# Altium PCB KRing_B2.PcbDoc
Units mil, origin at the board's own origin, x right, y up, seen from the top; angles counter-clockwise.
Board outline 1488.19 x 1488.19 mil, 2 copper layers (Top Layer, Bottom Layer), stack 42.17 mil thick; 73 components, 48 nets, 266 pads, 198 vias.
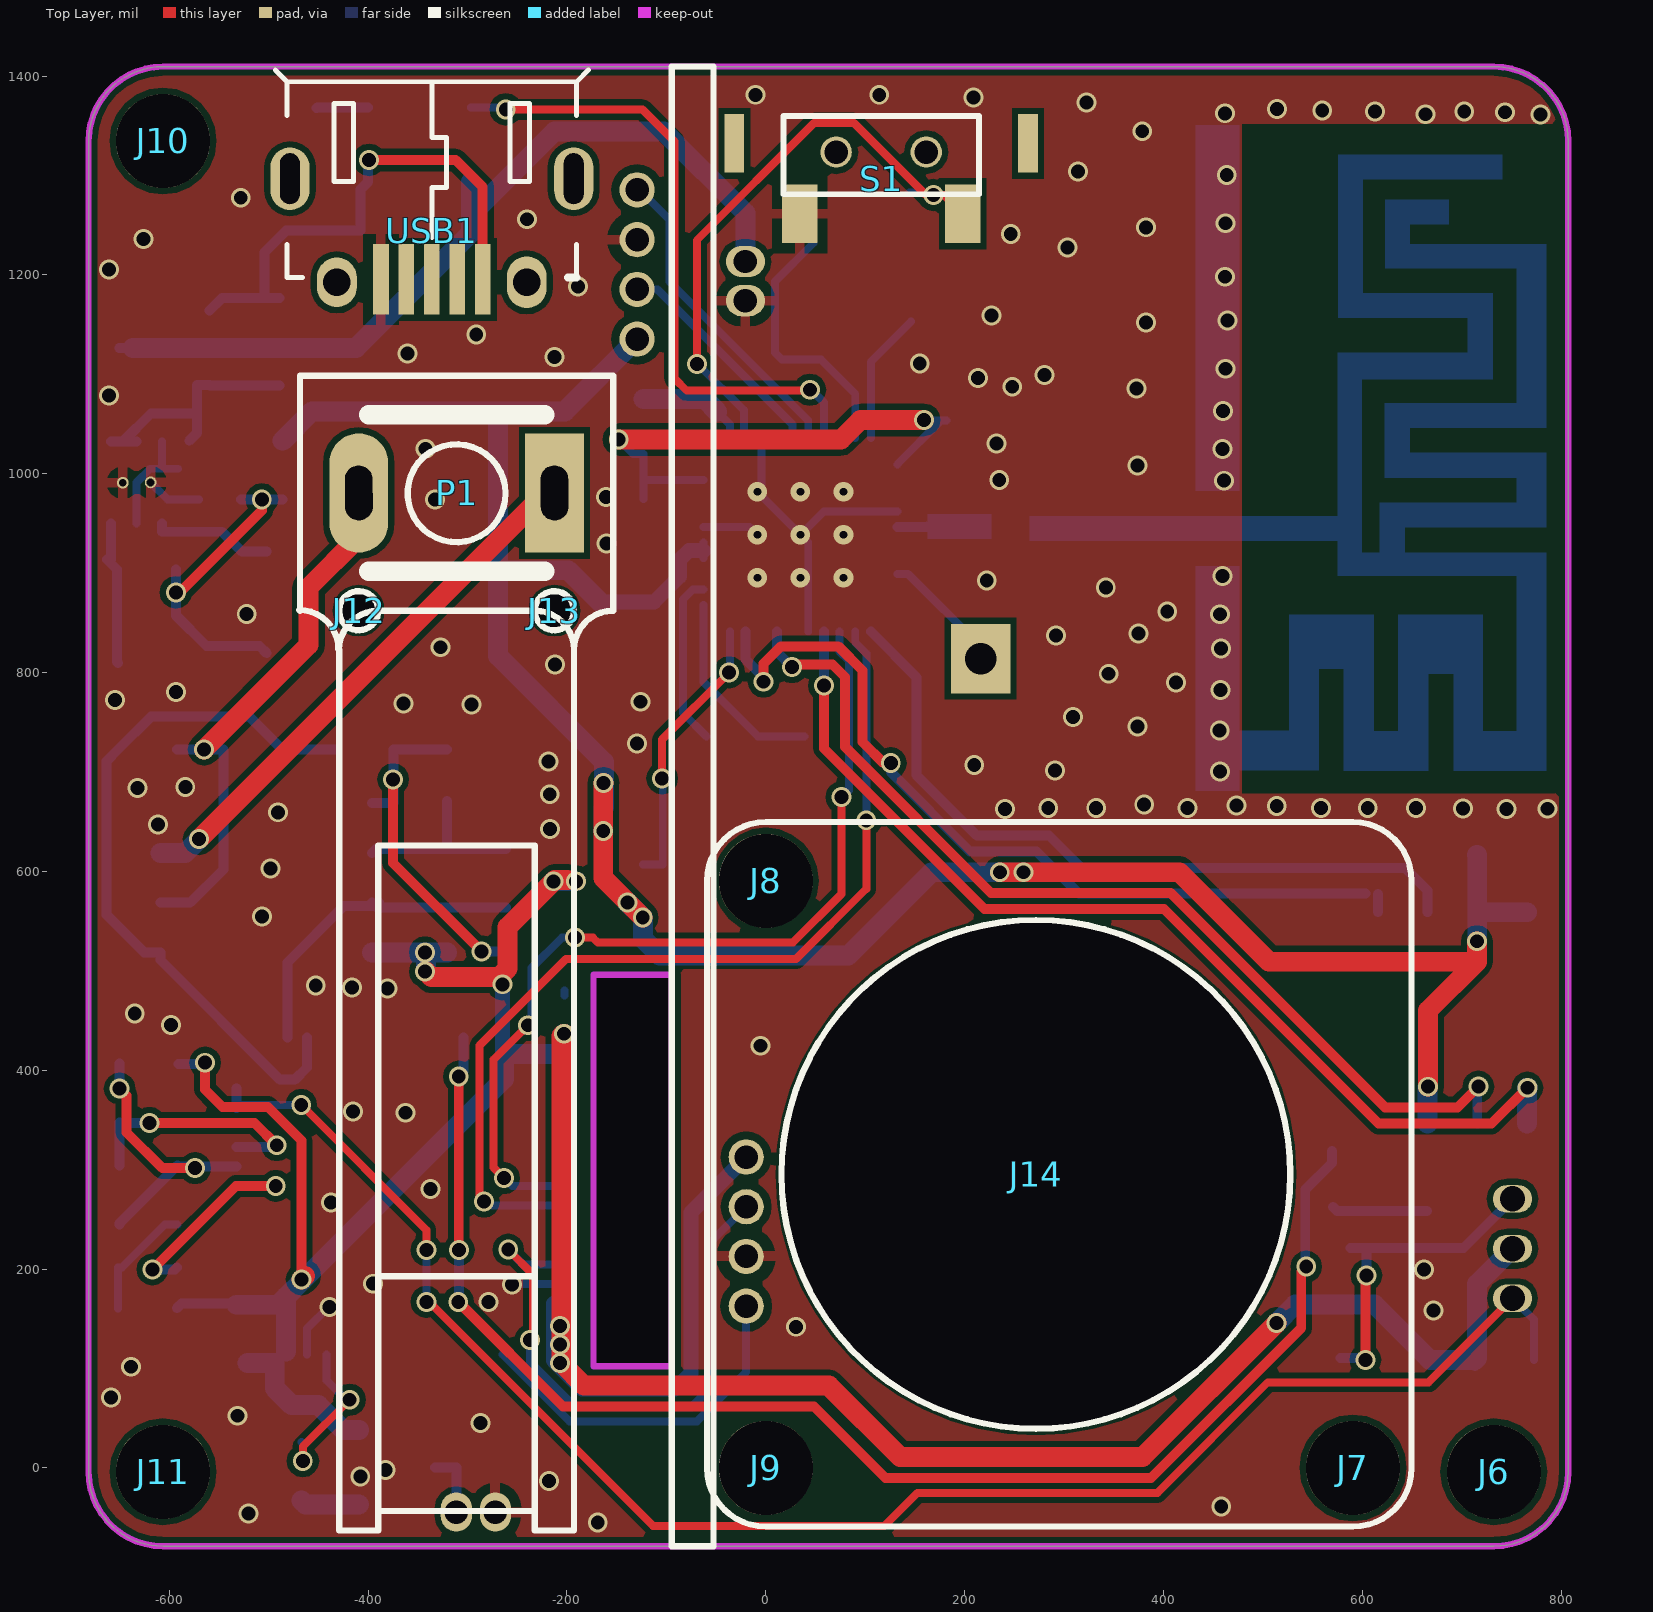
[diagram p0: Top Layer view]
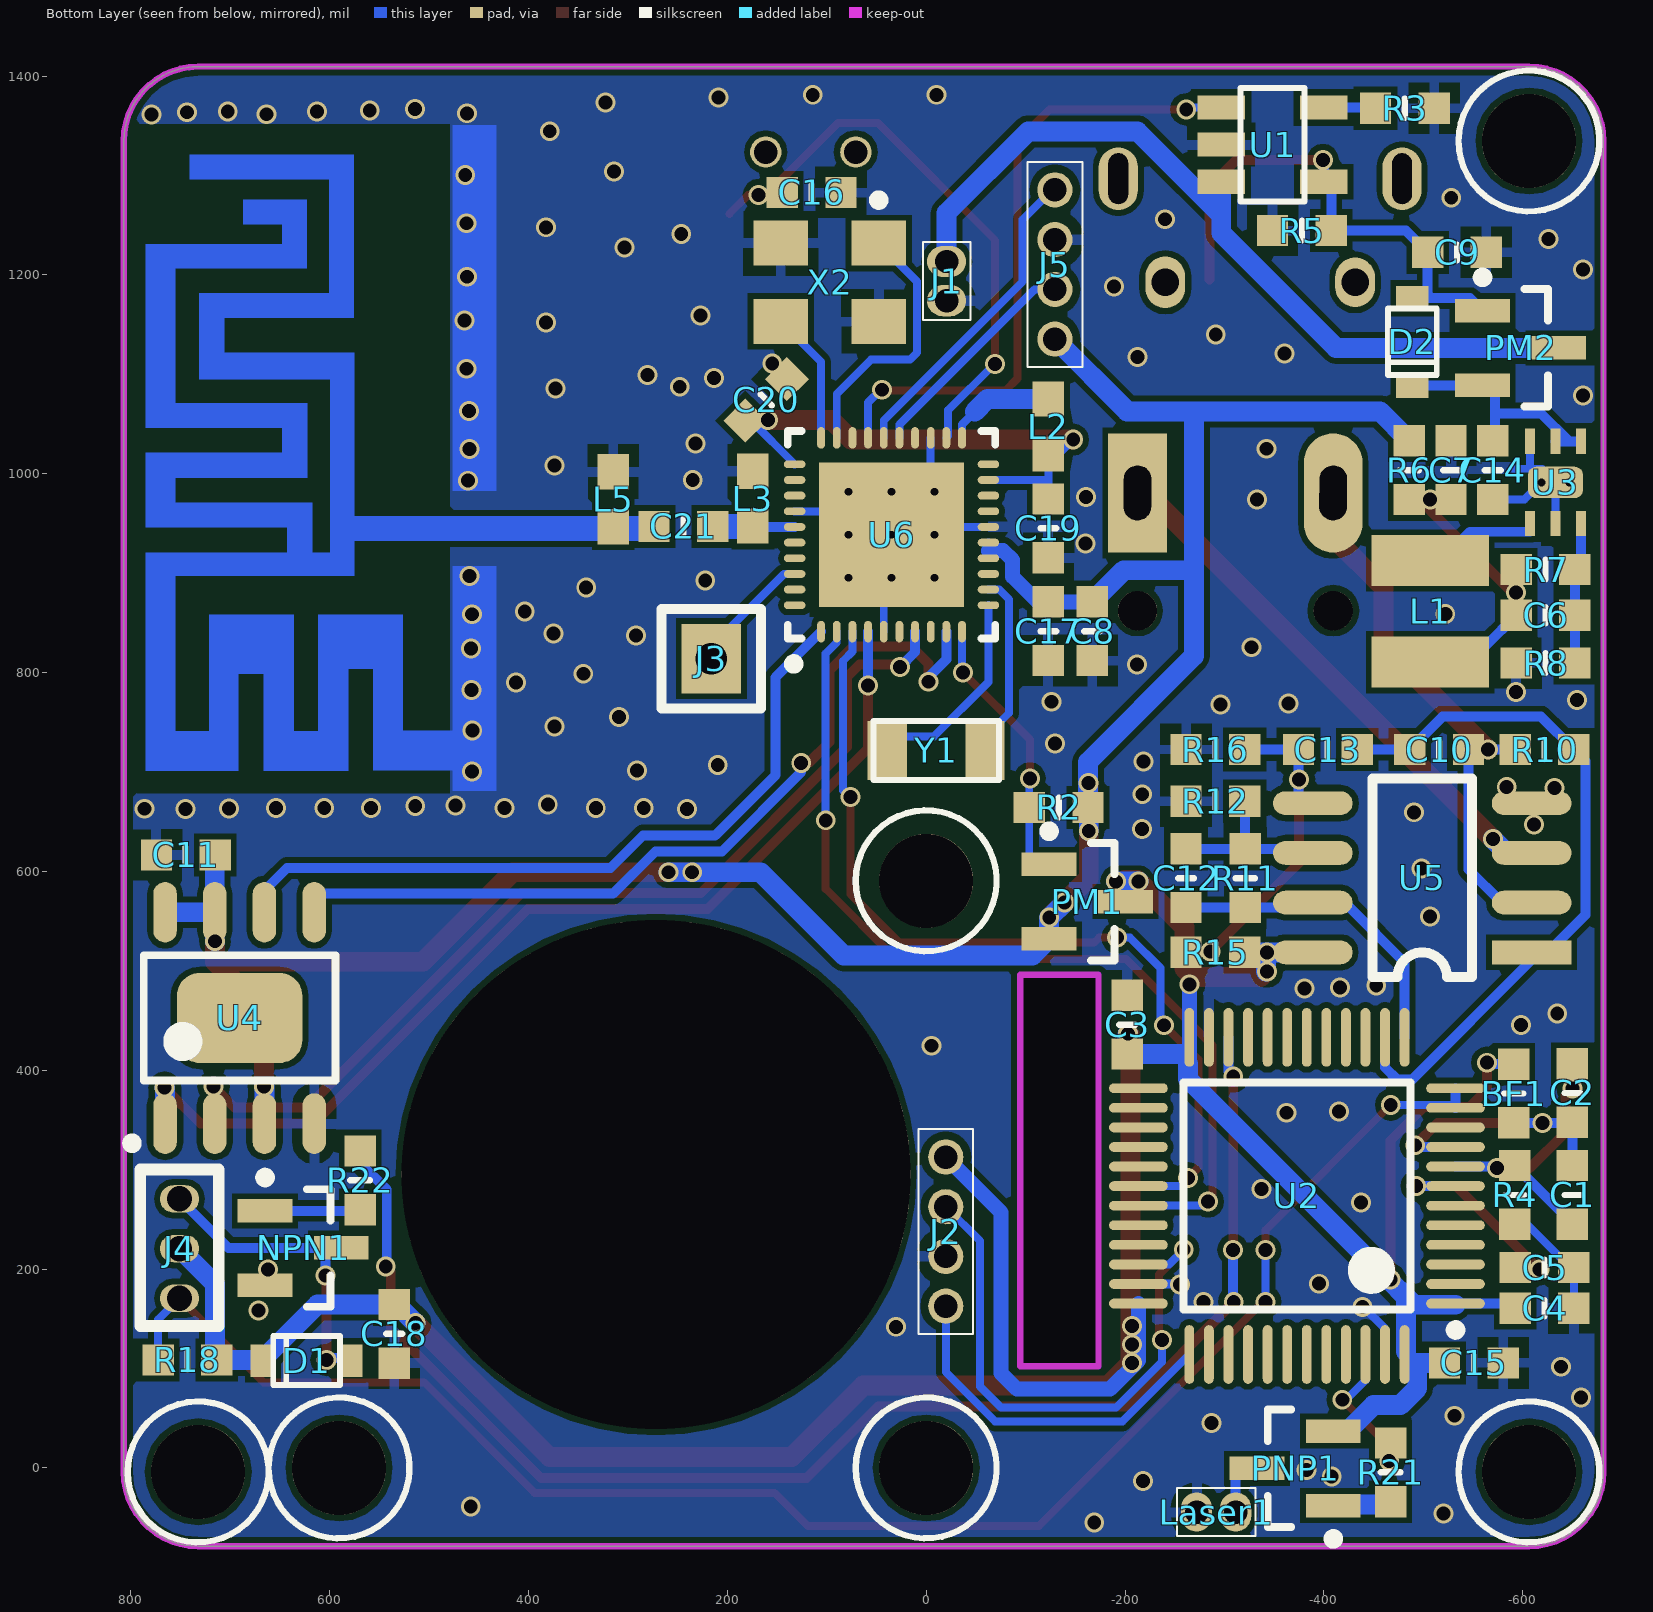
[diagram p1: Bottom Layer view, seen from below]

## Layer stack, top to bottom
Top Layer: signal copper 1.4
Dielectric: core 39.3701, FR-4, Dk 4.8
Bottom Layer: signal copper 1.4

## Board outline
-681.1,-3.94 -681.1,1334.65 cw(c-606.3,1334.65) -606.3,1409.45 732.28,1409.45 cw(c732.28,1334.65) 807.09,1334.65 807.09,-3.94 cw(c732.28,-3.94) 732.28,-78.74 -606.3,-78.74 cw(c-606.3,-3.94)
cut-out: -172.9,495.6 -93.9,495.6 -93.9,102.6 -172.9,102.6

## Design rules (kind name [scope] priority, off if disabled: settings)
Clearance "6mil Special" [(HasFootprint('FPC 0.5mm 4P') OR HasFootprint('FPC 0.5mm 16P') OR HasFootprint('QFN40P500X500X90_HS-41L'))] p1: gap=6
Clearance "8mil all" [All] p2: gap=6
ComponentClearance [All] p1: gap=-3937.01 collisioncheckmode=3 verticalgap=10 showdistances=FALSE
Height [All] p1: minheight=0 maxheight=2000 prefheight=500
HoleSize [All] p1: absolutevalues=TRUE maxlimit=71537.31 minlimit=0 maxpercent=80.000 minpercent=20.000
HoleToHoleClearance [All] p1: gap=8 allowstackedmicrovias=TRUE
MinimumSolderMaskSliver [All] p1: minsoldermaskwidth=0
PolygonConnect PolygonConnect_1 [isvia] p1: connectstyle=Direct reliefconductorwidth=10 reliefentries=4 polygonreliefangle="90 Angle" airgapwidth=10
PolygonConnect [All] p2: connectstyle=Relief reliefconductorwidth=10 reliefentries=4 polygonreliefangle="90 Angle" airgapwidth=10
RoutingCorners [All] p1: cornerstyle=45-Degree minsetback=10 maxsetback=100
RoutingVias [All] p1: holewidth=14 width=20 viastyle="Through Hole" minholewidth=14 minwidth=20 maxholewidth=100 maxwidth=200
SilkToSilkClearance [All] p1: silktosilkclearance=0
SilkToSolderMaskClearance [IsPad] p1: minsilkscreentomaskgap=0 clearancetoexposedcopper=TRUE
SolderMaskExpansion [All] p1: expansion=4
Width 20mil_Power [(InNet('EP_SUPPLY&VBAT') OR InNet('PSUPPLY') OR InNet('P_3.3V') OR InNet('PSUPPLYBAT') OR InNet('P_3.3V') OR InNet('P_5V'))] p1: maxlimit=39370.08 minlimit=8 preferedwidth=20
Width 8mil_Basic [All] p2: maxlimit=3937.01 minlimit=8 preferedwidth=10
20 further rules are at their usual default settings.

## Components (designator, comment, footprint, x,y, rotation, side; value= is the part's Value field where it differs from the comment)
BF1 "BF" R0603 -590.9,376.6 r90 bottom
C1 "1uf" C0603 -649.9,274.6 r90 bottom
C2 "0.1uf" C0603 -649.9,377.13 r270 bottom
C3 "1uf" C0603 -202.24,445.87 r270 bottom
C4 "1uf" C0603 -621.9,160.6 r0 bottom
C5 "1uf" C0603 -621.9,201.6 r0 bottom
C6 "22pf" C0603 -622.9,857.6 r180 bottom
C7 "10uf" C0603 -527.9,1003.6 r270 bottom
C8 "1uf" C0603 -166.9,841.6 r90 bottom
C9 "1uf" C0603 -533.9,1222.6 r0 bottom
C10 "6.8pF" C0603 -515.9,722.6 r180 bottom
C11 "10uf" C0603 744.68,616.57 r180 bottom
C12 "240pF" C0603 -261.37,593.13 r90 bottom
C13 "0.15uf" C0603 -403.9,722.6 r180 bottom
C14 "10uf" C0603 -569.9,1003.6 r270 bottom
C15 "1uf" C0603 -550.9,105.6 r180 bottom
C16 "10uf" C0603 115.16,1282.83 r0 bottom
C17 "10uf" C0603 -122.9,841.6 r90 bottom
C18 "10uf" C0603 535,134.92 r90 bottom
C19 "1uf" C0603 -122.9,945.08 r270 bottom
C20 "1uf" C0603 160.89,1074.3 r135 bottom
C21 "1uf" C0603 244.21,946.93 r0 bottom
D1 "1N5817" SOD323(0805) 623.23,107.95 r0 bottom
D2 "1N5817" SOD323(0805) -488.9,1132.6 r270 bottom
J1 "CON2" BATTRY_CONNECTOR -20.55,1213.43 r270 bottom
J2 "CON4" "CON4 1MM" -19.68,237.72 r90 bottom
J3 "CON1" CON1 216.14,813.9 r180 bottom
J4 "CON3" "Motor Connector" 751.01,220.64 r270 bottom
J5 "CON4" "CON4 1MM" -129.45,1210.39 r270 bottom
J6 "CON1" 2.4mm#1 736.1,-4.4 r0 top
J7 "CON1" 2.4mm#2 592.1,2.6 r0 top
J8 "CON1" 2.4mm#3 0.1,590.6 r0 top
J9 "CON1" 2.4mm#4 -4.9,1.6 r0 top
J10 "CON1" 2.4mm#5 -602.9,1335.6 r0 top
J11 "CON1" 2.4mm#6 -606.3,-4.4 r0 top
J12 "CON1" 0.5mm -409.45,862.2 r0 top
J13 "CON1" 0.5mm -212.6,862.2 r0 top
J14 "CON1" 6.5mm 274.1,297.6 r0 top
L1 "4.7uh" GDNR3012 -506.9,861.6 r180 bottom
L2 "2.2uh" L0603 -122.9,1047.44 r270 bottom
L3 "NC" L0603 174.49,974.96 r270 bottom
L5 "NC" L0603 314.8,974.29 r270 bottom
Laser1 "Laser" BATTRY_CONNECTOR -311.27,-44.4 r0 bottom
NPN1 "8050" SOT23-3 626.63,221.24 r180 bottom
P1 "photodetector" BPW34 -310.9,980.6 r180 top
PM1 "Si2303" SOT23-3 -161.93,569.57 r180 bottom
PM2 "Si2303" SOT23-3 -597.9,1126.6 r180 bottom
PNP1 "8550" SOT23-3 -371.1,-0.42 r0 bottom
R2 "100K" R0603 -133.19,664.29 r180 bottom
R3 "20K" R0603 -481.37,1367.6 r0 bottom
R4 "0" R0603 -591.9,274.6 r90 bottom
R5 "1M" R0603 -377.9,1244.6 r0 bottom
R6 "50R" R0603 -485.9,1003.6 r270 bottom
R7 "120K" R0603 -622.9,903.6 r0 bottom
R8 "27K" R0603 -622.9,809.6 r0 bottom
R10 "10M" R0603 -621.9,722.6 r180 bottom
R11 "220K" R0603 -320.9,593.13 r270 bottom
R12 "3K" R0603 -290.9,670.6 r180 bottom
R15 "2M" R0603 -290.9,518.6 r180 bottom
R16 "510" R0603 -290.9,722.6 r180 bottom
R18 "10K" R0603 743.01,108.64 r180 bottom
R21 "1K" R0603 -467.1,-4.42 r90 bottom
R22 "1K" R0603 569.33,289.29 r90 bottom
S1 "SW_Mini" SW_Mini 116.1,1312.6 r180 top
U1 "LTC4054" LTC4054 -348.33,1331.01 r270 bottom
U2 "STM32F103C8T6" TSQFP50P900X900X160-48L -372.9,273.6 r0 bottom
U3 "TPS62260" QFN2x2-6 -607.31,949.93 r90 bottom
U4 "W25X20CLSNIG" SOIC8 690.55,452.6 r90 bottom
U5 "LMC6482" LMC6482 -608.9,518.6 r0 bottom
U6 "DA14580-01AT1" QFN40P500X500X90_HS-41L 34.84,938.58 r90 bottom
USB1 "MicroUSB" MICROUSB -335.9,1244.6 r270 top locked
X2 "3225 16Mhz" 3225 97.01,1192.48 r270 bottom
Y1 "FC-135" FC-135 -10,721.61 r0 bottom

## Footprints (in the part's own frame and the unit in brackets; to place one, negate y for a bottom-side part, rotate by r counter-clockwise, add the part's x,y. Pads: shape width x height; smd on the part's side, far side on the other; paste and mask are expansions set on the pad)
0.5mm [mm]
  round 1 hole 1: 1(0,0)
2.4mm#1 [mm]
  round 2.4 hole 2.4: 1(-0.097,0.012)
2.4mm#2 [mm]
  round 2.4 hole 2.4: 1(-0.039,-0.066)
2.4mm#3 [mm]
  round 2.4 hole 2.4: 1(-0.002,-0.001)
2.4mm#4 [mm]
  round 2.4 hole 2.4: 1(0.125,-0.041)
2.4mm#5 [mm]
  round 2.4 hole 2.4: 1(-0.086,-0.024)
2.4mm#6 [mm]
  round 2.4 hole 2.4: 1(0,0.012)
6.5mm [mm]
  round 13 hole 13 unplated: ""(-0.062,-0.059)
3225 [mm]
  rect 1.15x1.4 smd: 1(-1,1.25) 2(-1,-1.25) 3(1,-1.25) 4(1,1.25)
  silkscreen extent -2.22,1.13 -1.98,1.37, body extent -1.25,-1.6 1.25,1.6, height 0.7
BATTRY_CONNECTOR [mm]
  oval 0.8x1 hole 0.6: 1(0,0) 2(1,0)
  silkscreen extent -0.5,-0.61 1.5,0.61
BPW34 [mm]
  rect 1.5x3.048 hole 0.7 slot 1.4 at 90.5 deg: A(-2.5,0)
  oval 1.5x3.048 hole 0.7 slot 1.4 at 90.5 deg: C(2.5,0)
  silkscreen extent -2.25,-2 2.25,2
C0603 [mm]
  rect 0.8x0.8 smd: 1(-0.75,0) 2(0.75,0)
  silkscreen extent 0,-0.2 0,0.2, body extent -0.8,-0.4 0.8,0.4, height 0.8
CON1 [mil]
  rect 60x70 hole 32: 1(0,0)
  silkscreen extent -50,-50 50,50, body extent -51,-50 52,50, height 295
"CON4 1MM" [mm]
  round 0.9 hole 0.6: 1(-1.905,0) 2(-0.635,0) 3(0.635,0) 4(1.905,0)
  silkscreen extent -2.62,-0.7 2.62,0.7
FC-135 [mm]
  rect 1x1.5 smd: 1(-1.25,0) 2(1.25,0)
  silkscreen extent -1.6,-0.75 1.6,0.75, body extent -1.6,-0.75 1.6,0.75, height 0.8
GDNR3012 [mm]
  rect 3x1.3 smd: 1(0,1.3) 2(0,-1.3)
  body extent -1.5,-1.5 1.5,1.5, height 1.2
L0603 [mm]
  rect 0.9x0.8 smd: 1(-0.7,0) 2(0.7,0)
  body extent -0.8,-0.4 0.8,0.4, height 0.8
LMC6482 [mil]
  rect 80x24 smd: 1(0,0)
  oval 80x24 smd: 2(0,-50) 3(0,-100) 4(0,-150) 5(220,-150) 6(220,-100) 7(220,-50) 8(220,0)
  silkscreen extent 60,-175 160,25, body extent 24,-176 196,27, height 43
LTC4054 [mm]
  rect 0.62x1.22 smd: 1(-0.95,-1.31) 2(0,-1.31) 3(0.95,-1.31) 4(0.95,1.31) 5(-0.95,1.31)
  silkscreen extent -1.45,-0.81 1.45,0.81, body extent -1.45,-0.82 1.45,0.81, height 1
MICROUSB [mm]
  oval 1.6x1 hole 0.5 slot 1.3 at 0 deg unplated: 0(-1.325,3.625) 0(-1.325,-3.625)
  rect 1.8x0.4 smd: 1(1.25,1.3) 2(1.25,0.65) 3(1.25,0) 4(1.25,-0.65) 5(1.25,-1.3)
  oval 1.321x1.016 hole 0.7 unplated: ""(1.325,2.425)
  oval 1.27x1.016 hole 0.7 unplated: ""(1.325,-2.425)
  silkscreen extent -4.1,-4 1.2,4, body extent -3.62,-3.96 1.81,4.02, height 2.99
"Motor Connector" [mm]
  oval 0.7x1 hole 0.65: 1(-1.27,0) 2(0,0) 3(1.27,0)
  silkscreen extent -2.02,-1 1.98,1
QFN2x2-6 [mm]
  rect 0.65x0.25 smd: 1(0,0) 2(0,-0.65) 3(0,-1.3) 4(2.1,-1.3) 5(2.1,-0.65) 6(2.1,0)
  round 0.3 hole 0.2: 7(1.04,-1) 7(1.05,-0.29)
  rrect50% 0.8x1.4 smd: 7(1.05,-0.65)
  body extent 0.22,-1.59 1.86,0.29, height 0.8
QFN40P500X500X90_HS-41L [mm] "QFN, 40-Leads, Body 5.00x5.00mm, Pitch 0.40mm, Thermal Pad 3.70x3.70mm, IPC High Density"
  oval 0.55x0.2 smd: 1(-2.475,1.8) 2(-2.475,1.4) 3(-2.475,1) 4(-2.475,0.6) 5(-2.475,0.2) 6(-2.475,-0.2) 7(-2.475,-0.6) 8(-2.475,-1) 9(-2.475,-1.4) 10(-2.475,-1.8) 21(2.475,-1.8) 22(2.475,-1.4) 23(2.475,-1) 24(2.475,-0.6) 25(2.475,-0.2) 26(2.475,0.2) 27(2.475,0.6) 28(2.475,1) 29(2.475,1.4) 30(2.475,1.8)
  oval 0.2x0.55 smd: 11(-1.8,-2.475) 12(-1.4,-2.475) 13(-1,-2.475) 14(-0.6,-2.475) 15(-0.2,-2.475) 16(0.2,-2.475) 17(0.6,-2.475) 18(1,-2.475) 19(1.4,-2.475) 20(1.8,-2.475) 31(1.8,2.475) 32(1.4,2.475) 33(1,2.475) 34(0.6,2.475) 35(0.2,2.475) 36(-0.2,2.475) 37(-0.6,2.475) 38(-1,2.475) 39(-1.4,2.475) 40(-1.8,2.475)
  rect 3.7x3.7 smd: 41(0,0)
  silkscreen extent -3.42,-2.65 2.65,2.65, body extent -2.5,-2.5 2.5,2.5, height 0.9
R0603 [mm]
  rect 0.8x0.8 smd: 1(-0.75,0) 2(0.75,0)
  silkscreen extent 0,-0.25 0,0.25, body extent -0.8,-0.4 0.8,0.4, height 0.5
SOD323(0805) [mm]
  rect 0.63x0.83 smd: A(-1.115,0) C(1.115,0)
  silkscreen extent -0.85,-0.63 0.85,0.63, body extent -0.85,-0.63 0.86,0.63, height 1.1
SOIC8 [mm]
  oval 1.55x0.6 smd: 1(-2.7,1.905) 2(-2.7,0.635) 3(-2.7,-0.635) 4(-2.7,-1.905) 5(2.7,-1.905) 6(2.7,-0.635) 7(2.7,0.635) 8(2.7,1.905)
  rrect50% 2.3x3.2 smd: 9(0,0)
  silkscreen extent -3.32,-2.45 1.6,2.88, body extent -1.65,-2.41 1.65,2.41, height 1.35
SOT23-3 [mm]
  rect 1.4x0.6 smd: 1(-0.975,0.95) 2(-0.975,-0.95) 3(0.975,0)
  silkscreen extent -1.1,-1.5 0.7,1.92, body extent -0.7,-1.5 0.7,1.5, height 1
SW_Mini [mm]
  rect 0.9x1.5 smd: 1(2.08,1.3) 2(-2.08,1.3)
  rect 0.5x1.5 smd: ""(-3.75,-0.5) ""(3.75,-0.5)
  round 0.8 hole 0.6: ""(-1.15,-0.277) ""(1.15,-0.277)
  silkscreen extent -2.5,-1.2 2.5,0.8, body extent -3.76,-2.28 3.74,1.72, height 3.4
TSQFP50P900X900X160-48L [mm] "TSQFP, 48-Leads, Body 7.00x7.00mm, Pitch 0.50mm, IPC High Density"
  oval 1.5x0.25 smd: 1(-4.05,2.75) 2(-4.05,2.25) 3(-4.05,1.75) 4(-4.05,1.25) 5(-4.05,0.75) 6(-4.05,0.25) 7(-4.05,-0.25) 8(-4.05,-0.75) 9(-4.05,-1.25) 10(-4.05,-1.75) 11(-4.05,-2.25) 12(-4.05,-2.75) 25(4.05,-2.75) 26(4.05,-2.25) 27(4.05,-1.75) 28(4.05,-1.25) 29(4.05,-0.75) 30(4.05,-0.25) 31(4.05,0.25) 32(4.05,0.75) 33(4.05,1.25) 34(4.05,1.75) 35(4.05,2.25) 36(4.05,2.75)
  oval 0.25x1.5 smd: 13(-2.75,-4.05) 14(-2.25,-4.05) 15(-1.75,-4.05) 16(-1.25,-4.05) 17(-0.75,-4.05) 18(-0.25,-4.05) 19(0.25,-4.05) 20(0.75,-4.05) 21(1.25,-4.05) 22(1.75,-4.05) 23(2.25,-4.05) 24(2.75,-4.05) 37(2.75,4.05) 38(2.25,4.05) 39(1.75,4.05) 40(1.25,4.05) 41(0.75,4.05) 42(0.25,4.05) 43(-0.25,4.05) 44(-0.75,4.05) 45(-1.25,4.05) 46(-1.75,4.05) 47(-2.25,4.05) 48(-2.75,4.05)
  silkscreen extent -4.17,-2.9 2.9,3.55, body extent -3.5,-3.5 3.5,3.5, height 1.6

## Part data
BF1: "磁珠"
C1 C2 C3 C4 C5 C6 C7 C8 C9 C10 C11 C12 C13 C14 C15 C16 C17 C18 C19 C20 C21: library part C
D1 D2: library part Diode
L1 L2 L3 L5: library part L
NPN1: library part NPN
PM1 PM2: library part PMOS
PNP1: library part PNP
R2 R3 R4 R5 R6 R7 R8 R10 R11 R12 R15 R16 R18 R21 R22: library part R

## Via types
v1: diameter 20, hole 14, Top Layer to Bottom Layer, 189 vias
v2: diameter 19.68, hole 7.87, Top Layer to Bottom Layer, 9 vias

## Nets (pads, with @x,y where several pads share a name; then routed paths per layer and width w, separated by ;. In a path a pad name is that pad's centre, name@x,y a point inside that pad or via, vN(x,y) a via of type N, cw(c..) or ccw(c..) an arc to the next point about the centre after c; other vN are vias at no path point)
AGND: C1.1 C2.1 R4.2 U2.8 | length 300.5
  Top Layer w10: v1(-649.9,381.6) -642.9,374.6 -642.9,337.55 -606.96,301.6 v1(-573.9,301.6)
  Bottom Layer w10: C1.1 -649.9,246.13 R4.2 -590.9,303.13 v1@-573.9,303.13 ; v1(-649.9,381.6) C2.1 ; v1(-573.9,301.6) v1@-573.9,303.13 ; U2.8 v1@-573.9,303.13
C_LASER: R21.2 U2.46 | length 158.3
  Top Layer w8: v1(-465.67,6.97) -465.67,21.46 v1(-418.51,68.63)
  Bottom Layer w8: R21.2@-466.9,26.13 -465.67,24.9 v1(-465.67,6.97) ; U2.46 -441.8,88.13 -422.3,68.63 v1(-418.51,68.63)
C_MOTOR: R22.2 U2.22 | length 1443.7
  Top Layer w10: v1(-309.33,167.1) -203.99,61.76 48.56,61.76 120.41,-10.09 387.56,-10.09 538.56,140.91 538.56,197.47 v1(543.56,202.48) ; v1(-308.82,393.68) -308.82,219.6 v1(-308.58,219.37)
  Bottom Layer w10: v1(-309.33,167.1) -308.58,167.84 v1(-308.58,219.37) ; v1(-308.82,393.68) -304,398.5 U2.22 ; v1(543.56,202.48) 542.58,203.46 542.58,280.07 569.33,306.82 R22.2
CHARGE_STATES: U1.1 U6.27 | length 654.1
  Top Layer w8: v1(-261.54,1366.38) -124.06,1366.38 -91.77,1334.09 -91.77,1095.79 -79.45,1083.46 43.46,1083.46 v1(44.41,1084.41)
  Bottom Layer w8: U1.1 -263.56,1368.41 v1(-261.54,1366.38) ; v1(44.41,1084.41) 45.59,1084.41 58.46,1071.54 U6.27
DA_RXD: U2.30 U6.3 | length 909.1
  Top Layer w8: v1(-263.15,291.57) -273.86,302.28 -273.86,410.6 v1(-239.2,445.26) ; v1(-192.09,533.35) -173.94,533.35 -168.97,528.38 27.2,528.38 76.02,577.2 v1(76.02,674.65)
  Bottom Layer w8: v1(-263.15,291.57) -255.02,283.45 U2.30 ; v1(-239.2,445.26) -235.63,448.83 -235.63,502.8 -205.08,533.35 v1(-192.09,533.35) ; 74.21,827.64 74.21,821.12 ; U6.3 74.21,821.12 ; v1(76.02,674.65) 76.94,674.65 83.54,681.24 83.54,811.79 74.21,821.12
DA_TXD: U2.31 U6.2 | length 948.1
  Top Layer w8: v1(-283.54,267.83) -287.86,272.15 -287.86,424.9 -200.87,511.89 30.51,511.89 101.06,582.44 v1(101.06,651.4)
  Bottom Layer w8: v1(-283.54,267.83) -279.47,263.76 U2.31 ; U6.2 89.96,830.29 101.06,819.19 v1(101.06,651.4)
EVCC: C9.2 D2.A PM2.1 R5.1 U1.4 USB1.1 | length 522.4
  Top Layer w10: v1(-398.9,1315.6) -311.9,1315.6 -284.72,1288.42 USB1.1
  Bottom Layer w10: PM2.1 -547.02,1176.5 -507.9,1176.5 ; D2.A -507.9,1176.5 ; v1(-398.9,1315.6) -399.9,1314.6 U1.4 -407.43,1286.08 R5.1 -482.37,1244.6 C9.2 -504.37,1180.03 -507.9,1176.5
F_CLK: U4.6 U6.1 | length 747.3
  Bottom Layer w10: U6.1 151.65,795.2 151.65,696.73 212.21,636.18 284.92,636.18 317.68,603.43 642.99,603.43 665.55,580.87 U4.6
F_CS: U4.1 U6.4 | length 1032.4
  Top Layer w10: v1(58.51,786.98) 58.51,723.7 220.02,562.18 400.65,562.18 616.37,346.46 730.01,346.46 v1(765.98,382.44)
  Bottom Layer w10: U6.4 U6.4 v1(58.51,786.98)
  Bottom Layer w20: U4.1 765.55,382.01 v1(765.98,382.44)
F_MISO: U4.2 U6.7 | length 1005.5
  Top Layer w10: v1(26.5,805.39) 29.08,807.98 67.21,807.98 79.51,795.67 79.51,725.32 226.65,578.18 407.28,578.18 623,362.46 695.65,362.46 v1(716.69,383.5)
  Bottom Layer w10: U6.7 11.22,820.67 v1(26.5,805.39) ; U4.2 715.55,382.36 v1(716.69,383.5)
F_MOSI: U4.5 U6.9 | length 857.3
  Top Layer w10: v1(-2.2,790.75) -2.2,808.94 15.25,826.39 72.86,826.39 97.31,801.94 97.31,730.15 118.61,708.85 v1(125.73,708.85)
  Bottom Layer w10: U6.9 -20.28,813.31 -2.2,795.24 v1(-2.2,790.75) ; v1(125.73,708.85) 125.73,699.87 205.42,620.18 272.3,620.18 314.76,577.72 603.23,577.72 ; U4.5 U4.5@615.55,577.13
GND: C3.1 C4.1 C5.1 C7.1 C8.1 C9.1 C11.1 C14.2 C15.2 C16.1 C17.1 C18.1 C19.2 C20.2 J1.2 J2.2 J5.2 L3.1 L5.1 Laser1.2 NPN1.2 R3.1 R4.1 R5.2 R8.2 R12.1 R16.1 S1.1 U1.2 U2.23 U2.35 U2.47 U3.2 U3.6 U3.7 U4.4 U5.4 U6.5 U6.16 U6.23 U6.34 U6.41 USB1.5 X2.2 X2.4 | length 786.3
  Bottom Layer w8: C4.1 C5.1 -647.74,201.6 -604.26,245.08 R4.1 ; U3.2 -632.9,991.27 U3.7@-619.17,1005 ; U3.7@-618.73,991.27 -601.54,974.08 C14.2 ; U3.6 -607.31,1005.13 -607.44,1005 U3.7@-619.17,1005 ; -591.3,1005 U3.7@-619.17,1005 ; U2.47 -461.48,140.18 -439.93,161.73 v1(-438.66,161.73) ; v1(-255.23,184.67) -254.88,185.02 U2.35 ; C3.1 C3.1@-202.24,480.4 ; U6.16 -16.34,946.46 v2(-8.46,938.58) ; U6.23 -4.53,977.95 v2(34.84,938.58) ; U6.5 42.72,930.71 v2(34.84,938.58) ; U6.34 58.46,962.2 v2(34.84,938.58)
  other v1: -169.02,-55 -520.43,-45.75 458.11,-38.9 -218.23,-13.03 -407.83,-8.46 -382.44,-1.93 -287.01,45.16 -531.42,52.48 -658.46,70.98 -638.43,101.77 30.47,141.97 671.61,158.19 -278.78,166.89 -395.04,185.31 662.17,199.41 -437.17,267.17 -337.17,280.47 -362.56,357.24 -415.35,358.7 -5.47,424.68 -598.27,445.67 -634.72,457.13 -380.59,482.05 -416.06,483.35 -452.64,485.31 -506.54,554.61 -498.35,602.91 -216.97,642.83 -611.38,647.17 -490.55,659.45 240.59,662.68 745,662.68 786.26,663.03 284.06,663.62 332.32,663.62 424.06,663.62 558.39,663.66 605.43,663.66 653.78,663.66 701.18,663.35 513.9,665.91 473.27,666.22 380.59,667.48 -217.32,677.56 -631.93,683.98 -583.86,684.72 456.85,700.39 290.79,701.3 209.68,707.09 -218.46,710.63 -129.61,728.7 456.54,741.65 373.86,745.71 309.13,755.35 -296.02,767.87 -364.37,769.06 -125.98,770.63 -654.53,772.2 -593.31,780.55 457.17,782.6 412.48,790.12 344.88,798.82 -212.2,808.15 457.8,824.17 -327.2,825.43 291.77,837.44 374.8,839.37 -522.09,859.02 456.85,858.66 403.78,861.57 341.97,885.71 222.24,892.48 459.41,897.01 -160.39,929.72 -332.6,974.13 -160.63,976.69 460.91,992.95 234.8,993.86 373.86,1008.35 -342.2,1025.08 459.41,1025 231.89,1030.55 459.76,1063.03 -660.55,1078.46 372.87,1085.59 247.91,1087.48 213.54,1096.22 280.2,1099.13 462.32,1105.59 154.84,1110.83 -212.68,1117.44 -360.2,1121.02 -291.22,1140.2 382.52,1152.24 464.57,1154.25 227.09,1158.98 -188.7,1188.19 461.69,1198.07 -660.55,1205.55 303.35,1227.56 -625.79,1236.14 246.38,1241.06 382.52,1247.83 462.32,1251.93 -240.28,1255.91 -528.07,1277.52 463.62,1300.59 313.98,1303.82 378.66,1344.41 663.46,1361.5 779.29,1361.18 461.69,1362.48 743.43,1363.54 612.87,1364.41 702.48,1364.33 559.68,1365.39 514.21,1366.65 322.68,1373.35 208.74,1378.19 -10.47,1381.1 114.09,1381.1
  other v2: -8.46,895.28 34.84,895.28 78.15,895.28 78.15,938.58 -8.46,981.89 34.84,981.89 78.15,981.89
LASER_STATE: PM1.1 R2.1 U6.10 | length 282.6
  Top Layer w8: v1(-104.29,693.62) -104.29,732.68 v1(-36.84,800.14)
  Bottom Layer w8: PM1.1 -103.66,606.97 R2.1 -103.66,692.99 v1(-104.29,693.62) ; v1(-36.84,800.14) -36.02,800.95 U6.10
M_SIG: J4.3 R18.1 U2.11 U2.12 | length 1687.9
  Top Layer w8: v1(-467.2,365.2) -341.4,239.39 v1(-341.4,219.14) ; v1(-341.4,167.1) -338.75,167.1 -113.27,-58.39 119.09,-58.39 152.39,-25.09 393.77,-25.09 504.97,86.1 666.47,86.1 J4.3
  Bottom Layer w8: U2.11 -529.34,365.2 v1(-467.2,365.2) ; v1(-341.4,167.1) v1(-341.4,219.14) ; J4.3 772.54,149.12 R18.1
  Bottom Layer w10: U2.11 U2.12
NetC5_2: C5.2 U2.7 | length 223.7
  Top Layer w10: v1(-616.9,199.6) -532.9,283.6 v1(-492.9,283.6)
  Bottom Layer w10: v1(-616.9,199.6) -594.37,199.6 C5.2 ; U2.7 -532.19,283.6 v1(-492.9,283.6)
NetC6_1: C6.1 C7.2 L1.2 R6.2 R7.2 | length 322.9
  Top Layer w10: v1@-589.37,880.6 -506.9,963.08 v1(-506.9,974.08)
  Bottom Layer w10: R7.2 v1(-593.37,880.6) C6.1 -562.37,826.6 -509.08,826.6 L1.2@-501.9,819.42 ; C7.2 v1(-506.9,974.08) R6.2
NetC6_2: C6.2 R7.1 R8.1 U3.3 | length 144.9
  Bottom Layer w10: R7.1@-662.49,913.67 R7.1 C6.2 -652.43,810.6 R8.1@-651.43,809.6 ; R7.1@-658.49,913.67 U3.3
NetC10_2: C10.2 P1.C R10.1 U5.2 | length 567.3
  Top Layer w20: v1(-564.9,722.6) -459.9,827.6 -459.9,885.6 -409.33,936.18 P1.C
  Bottom Layer w10: U5.2 -578.9,568.6 -545.43,602.08 C10.2 v1(-564.9,722.6) R10.1
NetC12_2: C12.2 R11.1 R12.2 U5.6 | length 184.3
  Bottom Layer w10: U5.6@-395.9,618.6 -391.85,622.66 R11.1 ; R12.2 -320.43,623.13 R11.1 ; C12.2 R11.1
NetC13_1: C13.1 R15.1 R16.2 U5.5 | length 364.3
  Top Layer w10: v1(-374.9,692.6) -374.9,608.6 v1(-285.9,519.6)
  Bottom Layer w10: U5.5@-395.9,668.6 -374.37,668.6 C13.1 R16.2 ; v1(-285.9,519.6) -262.37,519.6 R15.1
NetC14_1: C14.1 D2.C PM2.2 U3.4 U3.5 | length 264.9
  Bottom Layer w10: -645.7,1033.15 -645.7,1032.6 ; U3.5 -645.7,1032.6 ; C14.1@-579.9,1033.13 -571.9,1041.13 -571.9,1060.6 -618.24,1060.6 -646.24,1032.6 U3.4 -645.7,1032.6 ; -571.9,1062.6 -571.9,1089.2 PM2.2 -559.02,1088.71 D2.C
NetC19_1: C19.1 C20.1 L2.2 U6.19 U6.31 | length 536.9
  Top Layer w20: v1(-147.87,1034.37) 75.51,1034.37 95.28,1054.13 v1(159.25,1054.13)
  Bottom Layer w8: v1(-147.87,1034.37) -133.39,1019.88 L2.2 -122.9,993.7 ; C19.1 -122.9,993.7 ; U6.19 -122.9,993.7 ; U6.31 C20.1@176.26,1053.43 ; v1(159.25,1054.13) 159.96,1053.43 C20.1@176.26,1053.43 ; C20.1 C20.1@176.26,1053.43
NetC21_1: C21.1 L3.2 U6.35 | length 32
  Bottom Layer w10: U6.35 162.44,946.46 L3.2@162.68,946.69 ; L3.2@171.34,946.22 L3.2@172.4,945.16
NetC21_2: C21.2 L5.2
NetD1_A: D1.A J4.1 NPN1.3 | length 337.7
  Top Layer w10: v1(603.01,108.64) 603.01,192.64 v1(604.01,193.64)
  Bottom Layer w10: D1.A@578.11,110.64 601.01,110.64 v1(603.01,108.64) ; v1(604.01,193.64) 604.01,221.24 NPN1.3 701.61,221.24 J4.1
NetJ3_1: J3.1 U6.38 | length 126.4
  Bottom Layer w8: U6.38 143.13,899.21 216.14,826.21 J3.1
NetL1_1: L1.1 U3.1 | length 121.9
  Bottom Layer w10: U3.1 -607.31,941.6 -546.9,941.6 -527.08,921.79 L1.1@-501.9,921.79
NetL2_1: L2.1 U6.21 | length 111
  Bottom Layer w8: -48.78,1062.32 -36.02,1049.57 U6.21
  Bottom Layer w20: L2.1 -61.46,1075 -48.78,1062.32
NetLaser1_1: Laser1.1 PNP1.3 | length 66.2
  Bottom Layer w10: PNP1.3@-332.52,0.6 -311.27,0.6 Laser1.1
NetNPN1_1: NPN1.1 R22.1 | length 96.1
  Bottom Layer w10: R22.1@570.54,262.64 574.54,258.64 NPN1.1
NetPNP1_1: PNP1.1 R21.1 | length 59.2
  Bottom Layer w20: R21.1@-466.9,-32.92 -463.03,-36.8 PNP1.1@-409.29,-36.8
NetR3_2: R3.2 U1.5 | length 52.3
  Bottom Layer w10: R3.2 -451.04,1368.41 U1.5
NetU6_11: U6.11 Y1.2 | length 201.2
  Bottom Layer w8: U6.11 -62.6,790.63 -7.68,735.71 Y1.2@38.78,735.71
NetU6_12: U6.12 Y1.1 | length 172.6
  Bottom Layer w8: U6.12 -73.45,883.46 -83.43,873.49 -83.43,759.49 Y1.1@-59.65,735.71
NetU6_29: U6.29 X2.1 | length 268.3
  Bottom Layer w8: X2.1 9.13,1193.19 9.13,1121.73 16.18,1114.68 55.39,1114.68 89.96,1080.12 U6.29
NetU6_30: U6.30 X2.3 | length 133.9
  Bottom Layer w8: U6.30 105.71,1112.6 X2.3
NSWCLK: J2.1 U2.37 | length 359.7
  Bottom Layer w8: U2.37 -197.23,46.75 -69.4,46.75 -19.68,96.46 J2.1
NSWDIO: J2.3 U2.34 | length 581.9
  Top Layer w8: v1(-259.02,219.54) -234.02,194.54 -234.02,131.7 v1(-236.99,128.72)
  Bottom Layer w8: v1(-259.02,219.54) -244.19,204.71 U2.34 ; v1(-236.99,128.72) -236.99,106.68 -191.06,60.75 -75.2,60.75 -53.98,81.97 -53.98,228.42 J2.3
OUT1: C10.1 C13.2 R10.2 U2.14 U5.1 | length 723.4
  Bottom Layer w10: U5.1@-611.9,518.6 -625.26,518.6 -662.9,556.25 -662.9,711.13 R10.2 -618.43,755.6 -519.37,755.6 C10.1 C13.2 ; U5.1 -608.9,510.83 -488.59,390.53 -473.75,390.53 -461.48,402.79 U2.14
OUT2: C12.1 R11.2 U2.13 U5.7 | length 329.1
  Bottom Layer w10: U2.13 -481.17,508.34 -424.4,565.1 U5.7@-392.4,565.1 ; U5.7@-395.9,568.6 U5.7@-392.4,565.1 ; U5.7 U5.7@-392.4,565.1 ; C12.1 R11.2 -390.9,563.6 U5.7@-392.4,565.1
P_3.3V: C8.2 C11.2 C17.2 J5.4 PM1.2 R2.2 R6.1 U4.3 U4.7 U4.8 U6.14 U6.15 | length 2607.6
  Top Layer w20: v1(-163.07,688.9) -163.46,688.5 v1(-163.46,640.59) -163.46,593.23 v1(-123.78,553.54) ; v1(235.35,599.18) v1(259.09,599.18) 415.98,599.18 505.99,509.17 715.28,509.17 ; v1(666.14,383.46) 666.14,460.04 715.28,509.17 ; v1(715.28,529.76) 715.28,509.17
  Bottom Layer w8: U6.14 -62.6,922.44 U6.15
  Bottom Layer w15: C8.2 C17.2 -112.18,871.13 -86.93,896.38 -86.93,913.11 -77.4,922.64 -62.8,922.64 -62.6,922.44
  Bottom Layer w20: R6.1 -456.32,1062.72 -202.13,1062.72 J5.4 ; -269.17,902.87 -198.64,902.87 C8.2 ; -269.17,1060.51 -269.17,816.57 -162.72,710.12 R2.2 -163.46,663.54 v1(-163.46,640.59) ; v1(-139.25,568.7) -124.09,553.54 v1(-123.78,553.54) -123.54,553.31 PM1.2 -106.85,515.47 82.95,515.47 166.66,599.18 v1(235.35,599.18) v1(259.09,599.18) ; U4.3 665.55,382.87 v1(666.14,383.46) ; C11.2 715.55,616.18 U4.7 ; v1(715.28,529.76) 715.55,530.04 U4.7 ; U4.8 U4.7
P_C3.3V: BF1.2 C3.2 C4.2 C15.1 C18.2 D1.C J2.4 J4.2 PM1.3 PNP1.2 R15.2 R18.2 U2.1 U2.24 U2.36 U2.48 U5.8 | length 3421.1
  Top Layer w10: v1(-563.9,407.6) -563.9,380.6 -546.37,363.08 -500.68,363.08 -466.9,329.3 v1(-466.9,189.6)
  Top Layer w20: v1(-466.9,189.6) v1@-463.4,193.11 ; v1@-341.85,499.25 -336.2,493.6 -268.25,493.6 -259.68,502.17 -259.68,543.9 v1(-213.54,590.04) -212.28,591.3 v1@-199.37,591.3 ; v1@-205.6,105.6 -182.76,82.76 63.39,82.76 135.24,10.91 378.86,10.91 v1(513.58,145.63) ; v1@-205.47,105.47 -205.47,434.37 v1(-203.15,436.69)
  Bottom Layer w10: C4.2 -587.64,165.34 U2.1 ; BF1.2 -565.37,406.13 v1(-563.9,407.6) ; v1(-466.9,189.6) v1@-465.9,188.6 ; v1(-265,486.46) v1@-264.63,486.09 ; D1.C@665.91,110.64 D1.C@667.91,108.64 ; R18.2@713.48,102.64 R18.2
  Bottom Layer w15: v1(-265,486.46) -265,408.38 U2.24@-263.39,406.77 ; U2.36 -213.45,107.89 -184.94,79.37 -91.18,79.37 -75.32,95.24 -75.32,257.09 J2.4
  Bottom Layer w20: U2.1@-532.35,164.1 -490.41,164.1 -482.41,172.1 ; C15.1 -493.9,105.6 -493.9,80.24 -476.81,63.15 -449.8,63.15 -424.65,38.01 PNP1.2@-409.29,38.01 ; U2.48@-482.41,117.1 -482.41,172.1 ; -482.41,172.6 -482.41,172.1 ; U5.8@-395.9,518.6 v1(-342.91,518.6) ; v1@-341.85,499.25 -341.85,517.54 v1(-342.91,518.6) ; R15.2 v1(-342.91,518.6) ; U2.24@-263.39,406.77 -263.39,391.12 -465.9,188.6 -482.41,172.1 ; -258.94,416.34 C3.2 -202.24,435.79 v1(-203.15,436.69) ; v1(-213.54,590.04) v1(-190.94,590.04) ; v1(513.58,145.63) 532.4,164.45 C18.2 612.1,164.45 D1.C@665.91,110.64 ; D1.C@667.91,108.64 R18.2 715.33,110.49 715.33,184.96 J4.2
  other v1: -207.05,105.47 -207.05,124.13 -207.05,142.72 -342.91,499.25
SW_WAKEUP: C16.2 S1.2 U6.22 | length 598.6
  Top Layer w8: v1(-69.37,1110.2) -69.37,1234.76 48.46,1352.6 88.82,1352.6 161.02,1280.39 v1(168.66,1280.39) 179.02,1280.39 S1.2
  Bottom Layer w8: v1(-69.37,1110.2) -68.37,1110.2 -22.02,1063.85 -22.02,1037.77 U6.22 ; C16.2 166.22,1282.83 v1(168.66,1280.39)
SWCLK: J5.1 U6.26 | length 322.2
  Bottom Layer w8: J5.1 -126.87,1285.39 -97.05,1255.57 -97.05,1193.38 42.72,1053.62 U6.26
SWDIO: J5.3 U6.25 | length 239.1
  Bottom Layer w8: J5.3 -108.86,1185.39 26.97,1049.57 U6.25 26.97,1048.95
V0.58: P1.A U5.3 | length 546.4
  Top Layer w20: v1(-569.9,632.6) -221.9,980.6 P1.A
  Bottom Layer w20: U5.3 -583.9,618.6 v1(-569.9,632.6)
VBAT: J1.1 PM2.3 U1.3 | length 845
  Bottom Layer w10: PM2.3@-650.27,1126.6 PM2.3
  Bottom Layer w20: PM2.3 -412.25,1126.6 -296.75,1242.1 U1.3 ; -295.53,1261.24 -212.51,1344.26 -102.65,1344.26 -20.55,1262.17 J1.1
VDDA: BF1.1 C1.2 C2.2 U2.9 | length 281.2
  Top Layer w10: v1(-619.9,347.08) -514.37,347.08 v1(-491.9,324.6)
  Bottom Layer w10: C1.2 C2.2 -649.37,347.08 v1(-619.9,347.08) BF1.1 ; U2.9 -493.69,322.82 v1(-491.9,324.6)
pads on no net: J6.1 J7.1 J8.1 J9.1 J10.1 J11.1 J12.1 J13.1 J14. S1. U2.2 U2.3 U2.4 U2.5 U2.6 U2.10 U2.15 U2.16 U2.17 U2.18 U2.19 U2.20 U2.21 U2.25 U2.26 U2.27 U2.28 U2.29 U2.32 U2.33 U2.38 U2.39 U2.40 U2.41 U2.42 U2.43 U2.44 U2.45 U4.9 U6.6 U6.8 U6.13 U6.17 U6.18 U6.20 U6.24 U6.28 U6.32 U6.33 U6.36 U6.37 U6.39 U6.40 USB1. USB1.0 USB1.2 USB1.3 USB1.4

## Polygon pours and split planes (outlines as drawn)
GND on Top Layer "Top Layer-No Net" (solid, remove dead copper, pour order 4): 1010.55,1545.55 -987.95,1545.55 -987.95,-109.37 -982.95,-104.37 1008.07,-104.37
GND on Bottom Layer "Top Layer-No Net" (solid, remove dead copper, pour order 3): 1048.82,1507.32 -949.68,1507.32 -949.68,-147.6 -944.68,-142.6 1046.34,-142.6

## Keep-outs
Keep-Out Layer:
  lines w6.3: -681.1,-3.94 ccw(c-606.3,-3.94) -606.3,-78.74 732.28,-78.74 ccw(c732.28,-3.94) 807.09,-3.94 807.09,1334.65 ccw(c732.28,1334.65) 732.28,1409.45 -606.3,1409.45 ccw(c-606.3,1334.65) -681.1,1334.65 -681.1,-3.94 ; -173.23,102.36 -94.49,102.36 -94.49,496.06 -173.23,496.06 -173.23,102.36

## Other copper
Top Layer:
  pour cut-out: 842.4,1351.73 478.74,1351.73 478.86,677.87 842.44,678.82
Bottom Layer:
  rectangle net GND: 431.99,680.88 476.48,907.26
  rectangle net GND: 475.96,701.35 556.4,741.51
  rectangle net GND: 526.48,740.64 556.4,858.44
  rectangle: 550.85,803.71 611.52,858.44
  rectangle: 581.2,700.96 611.52,804.27
  rectangle: 609.35,701 666.36,741.16
  rectangle: 636.04,729.15 666.36,832.45
  rectangle: 636.04,798.64 721.36,858.44
  rectangle: 691.44,700.96 721.36,799.07
  rectangle: 755.22,701 785.37,920.92
  rectangle: 696.55,700.96 781.87,741.23
  rectangle: 574.78,896.9 779.19,920.92
  rectangle net NetC21_2: 574.78,896.9 599.63,1122.1
  rectangle: 617.03,896.9 642.66,971.23
  rectangle: 617.03,945.88 785.37,971.23
  rectangle: 755.14,945.96 785.29,1021.08
  rectangle: 622.26,995.92 785.29,1021.16
  rectangle: 622.22,995.92 648.01,1071.31
  rectangle: 622.22,1045.92 785.14,1071.35
  region: 755.18,1231.12 755.18,1045.92 785.14,1045.92 785.14,1231.12
  rectangle net NetC21_2: 265.43,932.3 588.96,957.42
  rectangle: 622.54,1206.27 785.14,1231.12
  rectangle: 622.54,1206.27 647.82,1276.04
  region: 622.54,1276.04 622.54,1250.84 686.91,1250.84 686.91,1276.04
  rectangle: 574.78,1094.74 731.4,1122.1
  rectangle: 705.73,1094.74 731.4,1181.82
  rectangle: 575.61,1156.59 731.4,1181.82
  rectangle: 575.65,1171.35 600.41,1321.19
  region: 582.22,1321.19 582.22,1295.68 740.77,1295.68 740.77,1321.19
  rectangle net GND: 431.95,982.42 476.44,1350.88
  region net NetC21_1: 162.5,959.42 162.5,934.23 226.87,934.23 226.87,959.42
  pour cut-out: 842.4,1351.73 478.74,1351.73 478.86,677.87 842.44,678.82

## Silkscreen, mask and mechanical layers (free items; w line width, h text height)
Top Overlay:
  circle w6.3: c271.65,295.28 r255.91
  circle w6.3: c-409.45,862.2 r19.69
  circle w6.3: c-212.6,862.2 r19.69
  circle w6.3: c-311.02,980.32 r49.21
  lines w6: -59.06,0 ccw(c0,0) 0,-59.06 590.55,-59.06 ccw(c590.55,0) 649.61,0 649.61,590.55 ccw(c590.55,590.55) 590.55,649.61 0,649.61 ccw(c0,590.55) -59.06,590.55 -59.06,0
  lines w6.3: -469.27,862.97 cw(c-469.27,823.6) -429.9,823.6 ; -468.5,862.2 -468.5,1098.43 -153.54,1098.43 -153.54,862.2 ccw(c-153.54,822.83) -192.91,822.83 ; -389.76,-43.31 -232.28,-43.31 ; -389.76,192.91 -387.26,192.91 -234.78,192.91 -232.28,192.91 ; -52.98,1409.45 -94.49,1409.45 -94.49,-78.74 -52.9,-78.74 ; -52.64,-78.94 -52.64,1409.25 ; -192.91,822.83 ccw(c-232.28,822.83) -232.28,862.2 -389.76,862.2 ccw(c-389.76,822.83) -429.13,822.83 -429.13,-62.99 -389.76,-62.99 -389.76,625.98 -232.28,625.98 -232.28,-62.99 -192.91,-62.99 -192.91,822.83
Bottom Overlay:
  circle w6.3: c-606.3,-3.94 r70.87
  circle w6.3: c-606.3,1334.65 r70.87
  circle w6.3: c732.28,-3.94 r70.87
  circle w6.3: c0,0 r70.87
  circle w6.3: c0,590.55 r70.87
  circle w6.3: c590.55,0 r70.87
Mechanical 3:
  lines w6.3: 430.96,678.48 430.96,1351.71 478.21,1351.71 478.21,678.48 430.96,678.48
Mechanical 4:
  lines w6.3: 430.96,678.48 430.96,1351.71 801.04,1351.71 801.04,678.48 430.96,678.48
Mechanical 5:
  lines w3.94: 446.71,875.33 cw(c446.71,883.2) 446.71,891.08 cw(c446.71,883.2) 446.71,875.33 ; 446.71,1044.62 cw(c446.71,1052.49) 446.71,1060.37 cw(c446.71,1052.49) 446.71,1044.62 ; 446.71,1154.86 cw(c446.71,1162.73) 446.71,1170.6 cw(c446.71,1162.73) 446.71,1154.86 ; 450.65,682.41 cw(c450.65,690.29) 450.65,698.16 cw(c450.65,690.29) 450.65,682.41 ; 450.65,796.59 cw(c450.65,804.46) 450.65,812.34 cw(c450.65,804.46) 450.65,796.59 ; 450.65,1269.03 cw(c450.65,1276.9) 450.65,1284.78 cw(c450.65,1276.9) 450.65,1269.03 ; 454.59,1206.04 cw(c454.59,1213.91) 454.59,1221.79 cw(c454.59,1213.91) 454.59,1206.04 ; 458.52,757.22 cw(c458.52,765.09) 458.52,772.97 cw(c458.52,765.09) 458.52,757.22 ; 458.52,839.9 cw(c458.52,847.77) 458.52,855.64 cw(c458.52,847.77) 458.52,839.9 ; 458.52,1001.31 cw(c458.52,1009.19) 458.52,1017.06 cw(c458.52,1009.19) 458.52,1001.31 ; 458.52,1099.74 cw(c458.52,1107.61) 458.52,1115.49 cw(c458.52,1107.61) 458.52,1099.74 ; 458.52,1316.27 cw(c458.52,1324.15) 458.52,1332.02 cw(c458.52,1324.15) 458.52,1316.27

## Text inside footprints (layer, text, board x,y; h text height)
U4: Mechanical 15 "1" at 684.08,470.31 h29.53 r180